# Altium PCB AgulhasCPU25.PCBDOC (part 10 of 10)
Units mm, origin at the board's own origin, x right, y up, seen from the top; angles counter-clockwise.
Board outline 179.96 x 114.94 mm, 2 copper layers (Top Layer, Top, Bottom Layer, Bottom), stack 1.341 mm thick; 247 components, 222 nets, 910 pads, 491 vias.
Unrouted connection lines stored in the file: 2.
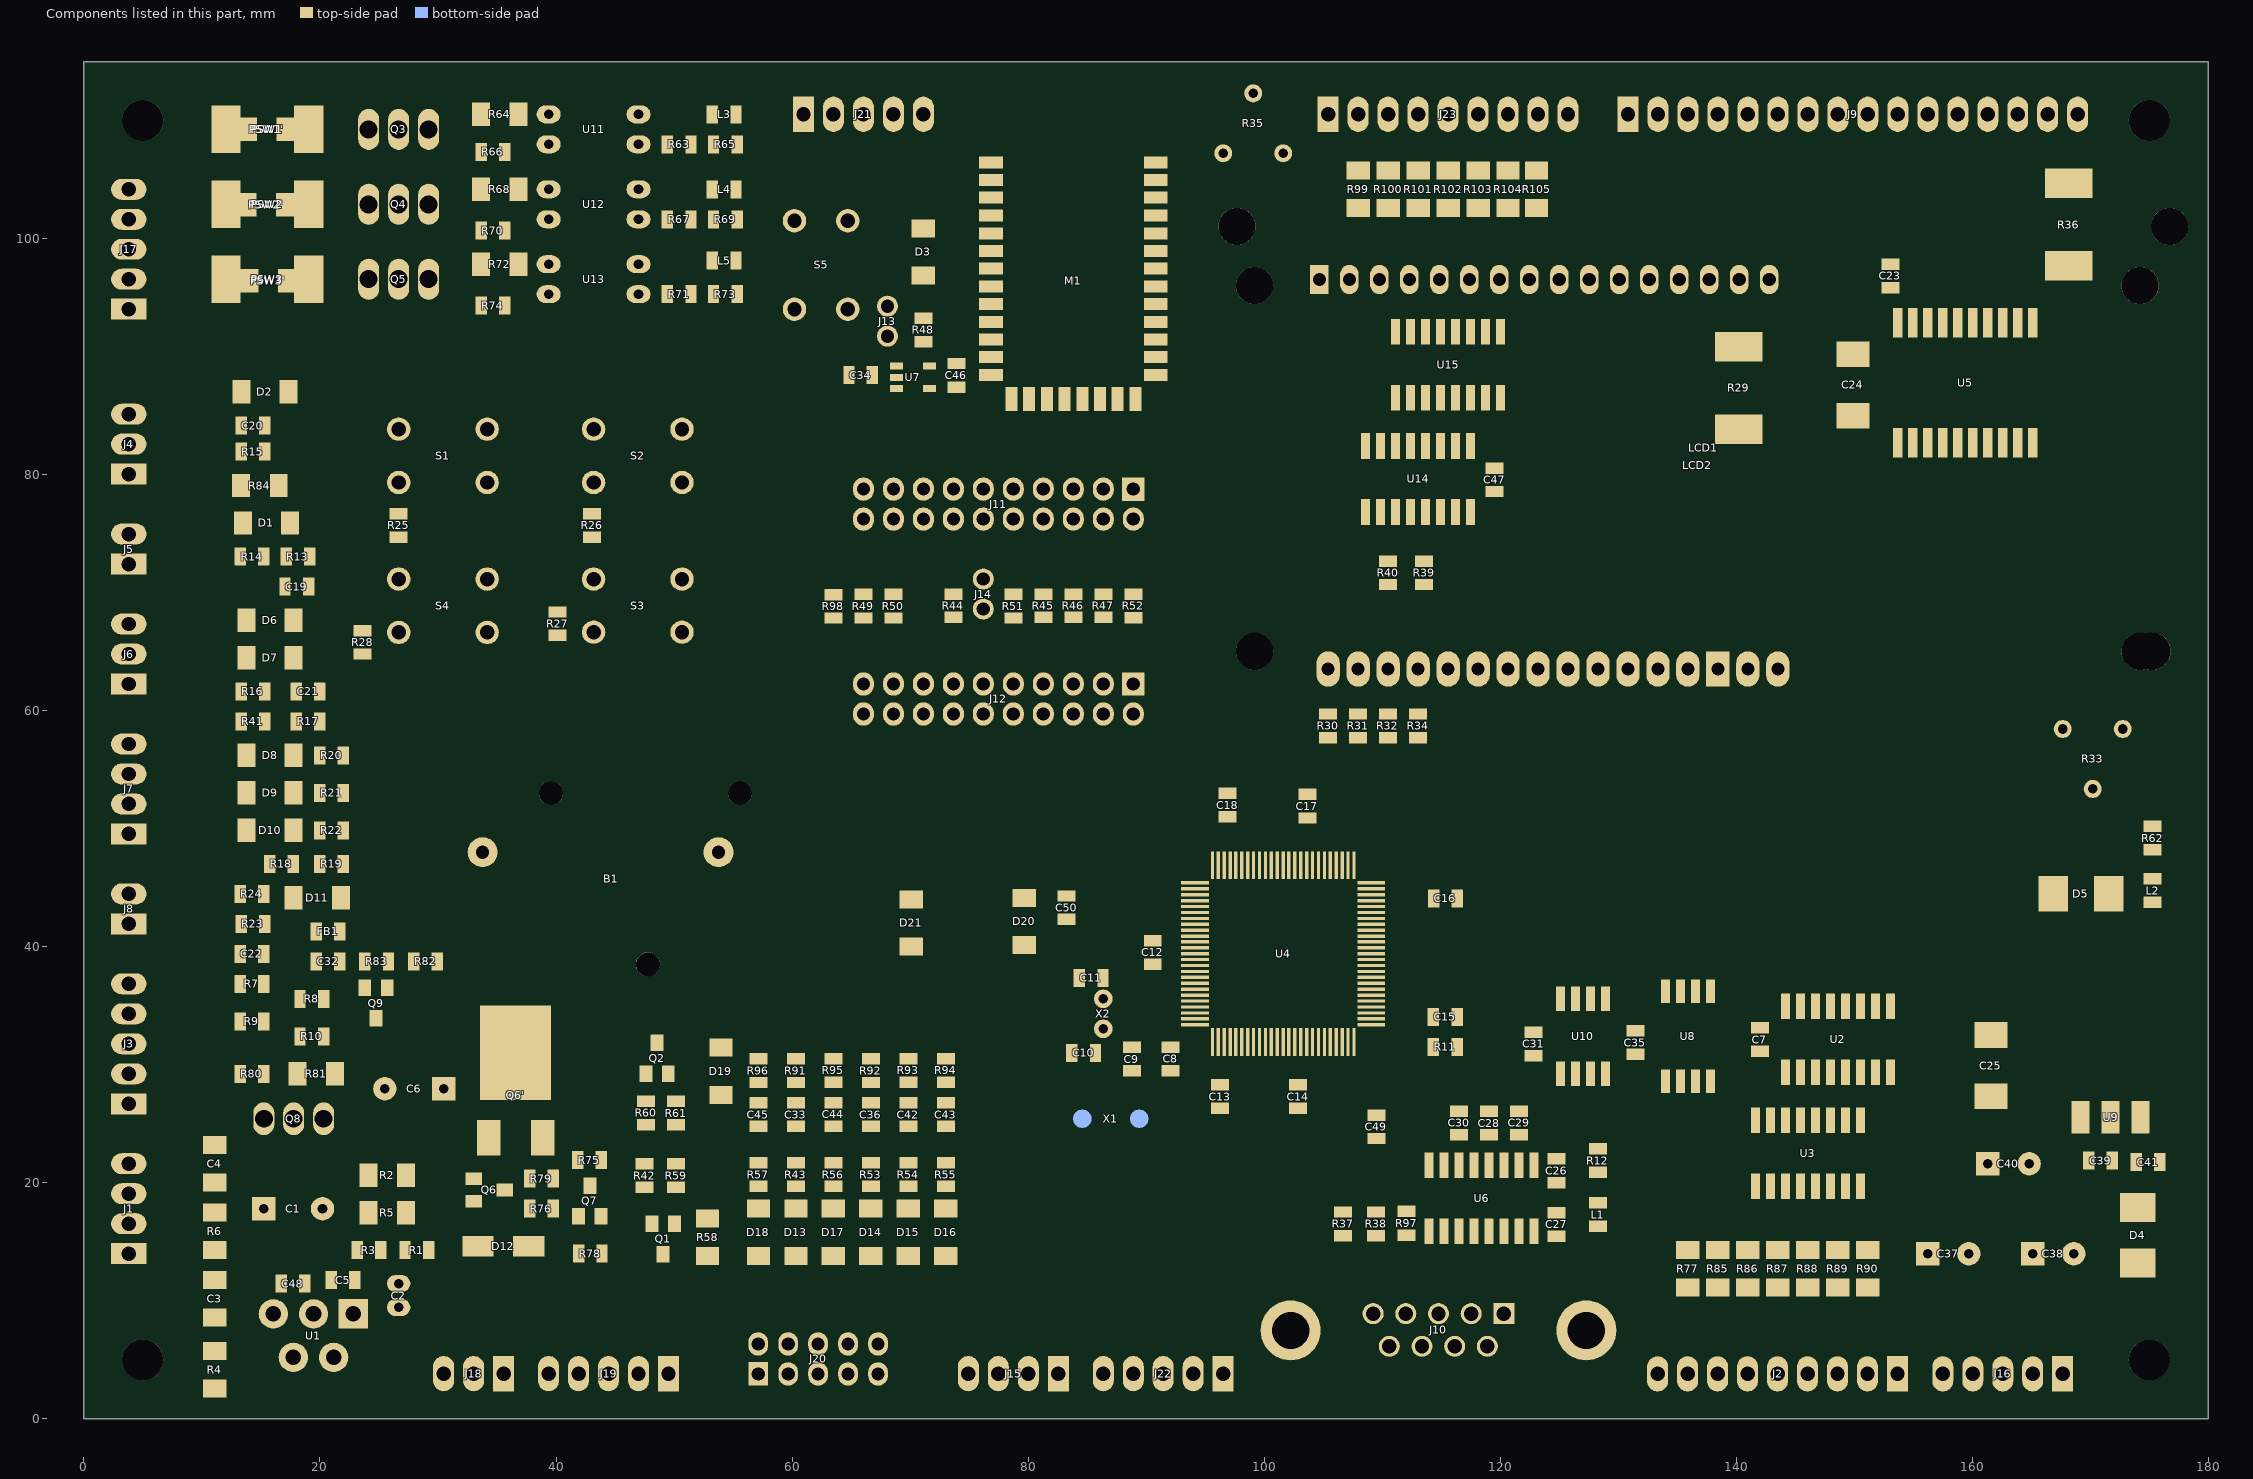
[diagram p10: the components of this part, seen from the top]

## Silkscreen, mask and mechanical layers (free items; w line width, h text height)
Top Overlay, Top Silk:
  drawing of 2148 lines, arcs and shapes, not listed
  text "TELET. V2" at 65.532,105.791 h1.52
  text "DISPLAY VENDA" at 142.621,105.41 h1.52
  text "MOTORES" at 7.62,102.87 h1.52 r270
  text "ROTACAO" at 8.255,87.376 h1.52 r270
  text "SENSOR" at 9.906,87.376 h1.52 r270
  text "ESC" at 27.813,86.36 h3.05
  text "INC" at 44.45,86.36 h3.05
  text ">" at 57.379,79.756 h3.57 r90
  text "DOSADOR" at 8.255,78.867 h2.03 r270
  text "SENSOR" at 9.906,68.707 h2.03 r270
  text "PAPEL" at 7.62,67.818 h2.03 r270
  text "<" at 57.633,65.786 h3.57 r90
  text "DEC" at 43.815,62.23 h3.05
  text "ENTER" at 26.289,62.103 h3.05
  text "10.00.0025" at 152.146,56.769 h3.05
  text "GPIO" at 8.001,55.88 h2.03 r270
  text "CPU Mais Pipoca Rev. D" at 133.985,53.721 h3.05
  text "SENSOR" at 9.906,47.371 h2.29 r270
  text "TEMP." at 7.747,45.72 h2.03 r270
  text "SINAIS" at 9.855,38.1 h2.03 r270
  text "POTENCIA" at 7.62,36.576 h2.03 r270
  text "PLACA" at 9.779,31.115 h2.03 r270
  text "V+ 0V A+ A-" at 7.239,22.606 h2.03 r270
  text "CARTÃO DE" at 85.09,13.335 h2.03
  text "CRÉDITO/" at 85.09,11.43 h2.03
  text "MOEDEIRO" at 52.705,10.033 h1.4
  text "PULSO" at 63.627,9.906 h1.4
  text "MOEDEIRO" at 29.845,9.525 h1.52
  text "NOTEIRO" at 38.735,9.525 h2.03
  text "NOTEIRO" at 85.09,9.525 h2.03
  text "ICT-UCA1" at 73.787,8.001 h2.03
  text "CCTALK" at 29.337,7.62 h1.52
  text "CCTALK" at 38.735,7.62 h2.03
  text "TRILOGY" at 85.09,7.62 h2.03
  text "LEDS" at 140.97,7.62 h1.52
Mechanical 3:
  circle w0.254: c118.872,28.321 r1
  circle w0.254: c126.365,31.115 r1
  circle w0.254: c128.905,37.719 r1
  circle w0.254: c136.525,38.481 r1
  circle w0.254: c132.334,39.37 r1
  circle w0.254: c120.904,31.242 r1
  circle w0.254: c129.921,32.512 r1
  circle w0.254: c159.69,13.97 r1
  circle w0.254: c156.21,13.97 r1
  circle w0.254: c168.58,13.97 r1
  circle w0.254: c165.1,13.97 r1
  circle w0.254: c164.795,21.59 r1
  circle w0.254: c161.29,21.59 r1
  circle w0.254: c168.91,110.49 r1
  circle w0.254: c166.37,110.49 r1
  circle w0.254: c163.83,110.49 r1
  circle w0.254: c161.29,110.49 r1
  circle w0.254: c158.75,110.49 r1
  circle w0.254: c156.21,110.49 r1
  circle w0.254: c143.51,110.49 r1
  circle w0.254: c140.97,110.49 r1
  circle w0.254: c138.43,110.49 r1
  circle w0.254: c135.89,110.49 r1
  circle w0.254: c133.35,110.49 r1
  circle w0.254: c130.81,110.49 r1
  circle w0.254: c125.73,110.49 r1
  circle w0.254: c123.19,110.49 r1
  circle w0.254: c120.65,110.49 r1
  circle w0.254: c118.11,110.49 r1
  circle w0.254: c115.57,110.49 r1
  circle w0.254: c113.03,110.49 r1
  circle w0.254: c110.49,110.49 r1
  circle w0.254: c107.95,110.49 r1
  circle w0.254: c105.41,110.49 r1
  circle w0.254: c143.51,63.5 r1
  circle w0.254: c140.97,63.5 r1
  circle w0.254: c138.43,63.5 r1
  circle w0.254: c135.89,63.5 r1
  circle w0.254: c133.35,63.5 r1
  circle w0.254: c130.81,63.5 r1
  circle w0.254: c128.27,63.5 r1
  circle w0.254: c125.73,63.5 r1
  circle w0.254: c113.03,63.5 r1
  circle w0.254: c110.49,63.5 r1
  circle w0.254: c107.95,63.5 r1
  circle w0.254: c105.41,63.5 r1
  circle w0.254: c88.9,62.23 r1
  circle w0.254: c86.36,62.23 r1
  circle w0.254: c83.82,62.23 r1
  circle w0.254: c81.28,62.23 r1
  circle w0.254: c78.74,62.23 r1
  circle w0.254: c76.2,62.23 r1
  circle w0.254: c73.66,62.23 r1
  circle w0.254: c71.12,62.23 r1
  circle w0.254: c68.58,62.23 r1
  circle w0.254: c66.04,59.69 r1
  circle w0.254: c66.04,62.23 r1
  circle w0.254: c83.82,78.74 r1
  circle w0.254: c76.2,78.74 r1
  circle w0.254: c66.04,76.2 r1
  circle w0.254: c66.04,78.74 r1
  circle w0.254: c73.66,76.2 r1
  circle w0.254: c73.66,78.74 r1
  circle w0.254: c71.12,76.2 r1
  circle w0.254: c71.12,78.74 r1
  circle w0.254: c68.58,76.2 r1
  circle w0.254: c68.58,78.74 r1
  circle w0.254: c71.12,110.49 r1
  circle w0.254: c68.58,110.49 r1
  circle w0.254: c66.04,110.49 r1
  circle w0.254: c63.5,110.49 r1
  circle w0.254: c60.96,110.49 r1
  circle w0.254: c3.81,104.14 r1
  circle w0.254: c3.81,101.6 r1
  circle w0.254: c3.81,99.06 r1
  circle w0.254: c3.81,96.52 r1
  circle w0.254: c3.81,93.98 r1
  circle w0.254: c3.81,85.09 r1
  circle w0.254: c3.81,82.55 r1
  circle w0.254: c3.81,80.01 r1
  circle w0.254: c3.81,74.93 r1
  circle w0.254: c3.81,72.39 r1
  circle w0.254: c3.81,67.31 r1
  circle w0.254: c3.81,64.77 r1
  circle w0.254: c3.81,62.23 r1
  circle w0.254: c3.81,57.15 r1
  circle w0.254: c3.81,54.61 r1
  circle w0.254: c3.81,52.07 r1
  circle w0.254: c3.81,49.53 r1
  circle w0.254: c3.81,44.45 r1
  circle w0.254: c3.81,41.91 r1
  circle w0.254: c3.81,36.83 r1
  circle w0.254: c3.81,34.29 r1
  circle w0.254: c3.81,31.75 r1
  circle w0.254: c3.81,29.21 r1
  circle w0.254: c3.81,26.67 r1
  circle w0.254: c3.81,21.59 r1
  circle w0.254: c3.81,19.05 r1
  circle w0.254: c3.81,16.51 r1
  circle w0.254: c3.81,13.97 r1
  circle w0.254: c30.48,3.81 r1
  circle w0.254: c33.02,3.81 r1
  circle w0.254: c35.56,3.81 r1
  circle w0.254: c39.37,3.81 r1
  circle w0.254: c41.91,3.81 r1
  circle w0.254: c46.99,3.81 r1
  circle w0.254: c49.53,3.81 r1
  circle w0.254: c57.125,6.325 r1
  circle w0.254: c57.125,3.785 r1
  circle w0.254: c59.665,3.785 r1
  circle w0.254: c59.665,6.325 r1
  circle w0.254: c62.205,6.325 r1
  circle w0.254: c64.745,3.785 r1
  circle w0.254: c64.745,6.325 r1
  circle w0.254: c67.285,6.325 r1
  circle w0.254: c67.285,3.785 r1
  circle w0.254: c74.93,3.81 r1
  circle w0.254: c77.47,3.81 r1
  circle w0.254: c80.01,3.81 r1
  circle w0.254: c82.55,3.81 r1
  circle w0.254: c86.36,3.81 r1
  circle w0.254: c88.9,3.81 r1
  circle w0.254: c91.44,3.81 r1
  circle w0.254: c93.98,3.81 r1
  circle w0.254: c96.52,3.81 r1
  circle w0.254: c109.22,8.89 r1
  circle w0.254: c114.757,8.89 r1
  circle w0.254: c117.526,8.89 r1
  circle w0.254: c133.325,3.785 r1
  circle w0.254: c135.865,3.785 r1
  circle w0.254: c138.405,3.785 r1
  circle w0.254: c140.945,3.785 r1
  circle w0.254: c143.485,3.785 r1
  circle w0.254: c146.025,3.785 r1
  circle w0.254: c148.565,3.785 r1
  circle w0.254: c151.105,3.785 r1
  circle w0.254: c153.645,3.785 r1
  circle w0.254: c157.48,3.785 r1
  circle w0.254: c160.02,3.785 r1
  circle w0.254: c162.56,3.785 r1
  circle w0.254: c165.1,3.785 r1
  circle w0.254: c167.64,3.785 r1
  lines w0.254: 0,0 0,114.935 179.959,114.935 179.959,0 0,0
Drill Drawing, Drill:
  circle w0.025: c192.611,89.662 r0.635
  lines w0.025: 191.976,77.597 193.246,77.597 193.246,78.867 191.976,78.867 191.976,77.597 ; 191.976,81.724 192.294,81.724 192.611,81.407 192.929,81.724 193.246,81.724 192.929,82.042 193.246,82.359 192.929,82.359 192.611,82.677 192.294,82.359 191.976,82.359 192.294,82.042 191.976,81.724 ; 191.976,86.487 193.246,86.487 192.611,85.217 191.976,86.487 ; 191.976,93.154 192.294,93.154 192.294,92.837 192.929,92.837 192.929,93.154 193.246,93.154 193.246,93.789 192.929,93.789 192.929,94.107 192.294,94.107 192.294,93.789 191.976,93.789 191.976,93.154 ; 191.976,97.282 192.611,96.647 193.246,97.282 192.611,97.917 191.976,97.282 ; 191.976,100.457 192.611,100.774 193.246,100.457 192.929,101.092 193.246,101.727 192.611,101.409 191.976,101.727 192.294,101.092 191.976,100.457 ; 191.976,104.267 193.246,104.267 193.246,105.537 191.976,105.537 191.976,104.267 ; 191.976,108.077 191.976,108.394 192.294,108.712 191.976,109.029 191.976,109.347 192.294,109.347 192.611,109.029 192.929,109.347 193.246,109.347 193.246,109.029 192.929,108.712 193.246,108.394 193.246,108.077 192.929,108.077 192.611,108.394 192.294,108.077 191.976,108.077 ; 192.23,104.521 192.992,104.521 192.992,105.283 192.23,105.283 192.23,104.521
  lines w0.381: 190.246,76.454 288.772,76.454 ; 190.246,110.744 288.772,110.744 ; 204.238,72.644 204.238,114.554 ; 221.963,72.644 221.963,114.554 ; 256.141,72.644 256.141,114.554 ; 268.99,72.644 268.99,114.554 ; 190.246,72.644 288.772,72.644 288.772,114.554 190.246,114.554 190.246,72.644
  text "Symbol" at 192.532,111.887 h1.83
  text "Hit Count" at 205.381,111.887 h1.83
  text "Finished Hole Size" at 223.106,111.887 h1.83
  text "Plated" at 257.284,111.887 h1.83
  text "Hole Type" at 270.133,111.887 h1.83
  text "3" at 205.381,108.077 h1.52
  text "80,00mil (2,032mm)" at 223.106,108.077 h1.52
  text "PTH" at 257.284,108.077 h1.52
  text "Round" at 270.133,108.077 h1.52
  text "4" at 205.381,104.267 h1.52
  text "137,00mil (3,480mm)" at 223.106,104.267 h1.52
  text "PTH" at 257.284,104.267 h1.52
  text "Round" at 270.133,104.267 h1.52
  text "5" at 205.381,100.457 h1.52
  text "52,00mil (1,321mm)" at 223.106,100.457 h1.52
  text "PTH" at 257.284,100.457 h1.52
  text "Round" at 270.133,100.457 h1.52
  text "9" at 205.381,96.647 h1.52
  text "124,00mil (3,150mm)" at 223.106,96.647 h1.52
  text "PTH" at 257.284,96.647 h1.52
  text "Round" at 270.133,96.647 h1.52
  text "12" at 205.381,92.837 h1.52
  text "60,00mil (1,524mm)" at 223.106,92.837 h1.52
  text "PTH" at 257.284,92.837 h1.52
  text "Round" at 270.133,92.837 h1.52
  text "34" at 205.381,89.027 h1.52
  text "32,00mil (0,813mm)" at 223.106,89.027 h1.52
  text "PTH" at 257.284,89.027 h1.52
  text "Round" at 270.133,89.027 h1.52
  text "88" at 205.381,85.217 h1.52
  text "44,00mil (1,118mm)" at 223.106,85.217 h1.52
  text "PTH" at 257.284,85.217 h1.52
  text "Round" at 270.133,85.217 h1.52
  text "118" at 205.381,81.407 h1.52
  text "48,00mil (1,219mm)" at 223.106,81.407 h1.52
  text "PTH" at 257.284,81.407 h1.52
  text "Round" at 270.133,81.407 h1.52
  text "489" at 205.381,77.597 h1.52
  text "20,00mil (0,508mm)" at 223.106,77.597 h1.52
  text "PTH" at 257.284,77.597 h1.52
  text "Round" at 270.133,77.597 h1.52
  text "762 Total" at 205.381,73.787 h1.52
  text "Placa Face Dupla, e=1,6mm; 0,5 Ozft2" at 190.246,66.421 h1.92

## Dimensions
0,114.935 to 179.959,114.935 on Mechanical 1, Top Assy

## Text inside footprints (layer, text, board x,y; h text height)
B1: Top Overlay, Top Silk "+" at 53.772,43.18 h2.89; Top Overlay, Top Silk "h=8,8mm" at 45.568,53.188 h1.44 r270; Top Overlay, Top Silk "Suporte Metaltex" at 50.292,56.667 h1.44 r270; Top Overlay, Top Silk "SB22" at 57.15,51.054 h1.44 r270; Top Overlay, Top Silk "para CR2325" at 47.93,54.864 h1.44 r270
C2: Top Overlay, Top Silk "+" at 28.346,13.005 h1.54 r270
C37: Top Overlay, Top Silk "+" at 152.298,12.522 h1.54
C38: Top Overlay, Top Silk "+" at 162.941,9.119 h1.54
C40: Top Overlay, Top Silk "+" at 157.404,20.142 h1.54
M1: Top Overlay, Top Silk "h=2,4mm" at 88.087,92.405 h1.44 r90; Top Overlay, Top Silk "Sem trilhas/ilhas" at 81.839,90.526 h1.16 r90; Top Overlay, Top Silk "no lado TOP" at 84.43,92.126 h1.16 r90; Top Overlay, Top Silk "Area da antena" at 77.902,111.328 h0.95